# Altium PCB PCB4.PcbDoc
Units mil, origin at the board's own origin, x right, y up, seen from the top; angles counter-clockwise.
Board outline 6000 x 4000 mil, 2 copper layers (Top Layer, Bottom Layer); 80 components, 13 nets, 268 pads, 16 vias.
Unrouted connection lines stored in the file: 2.
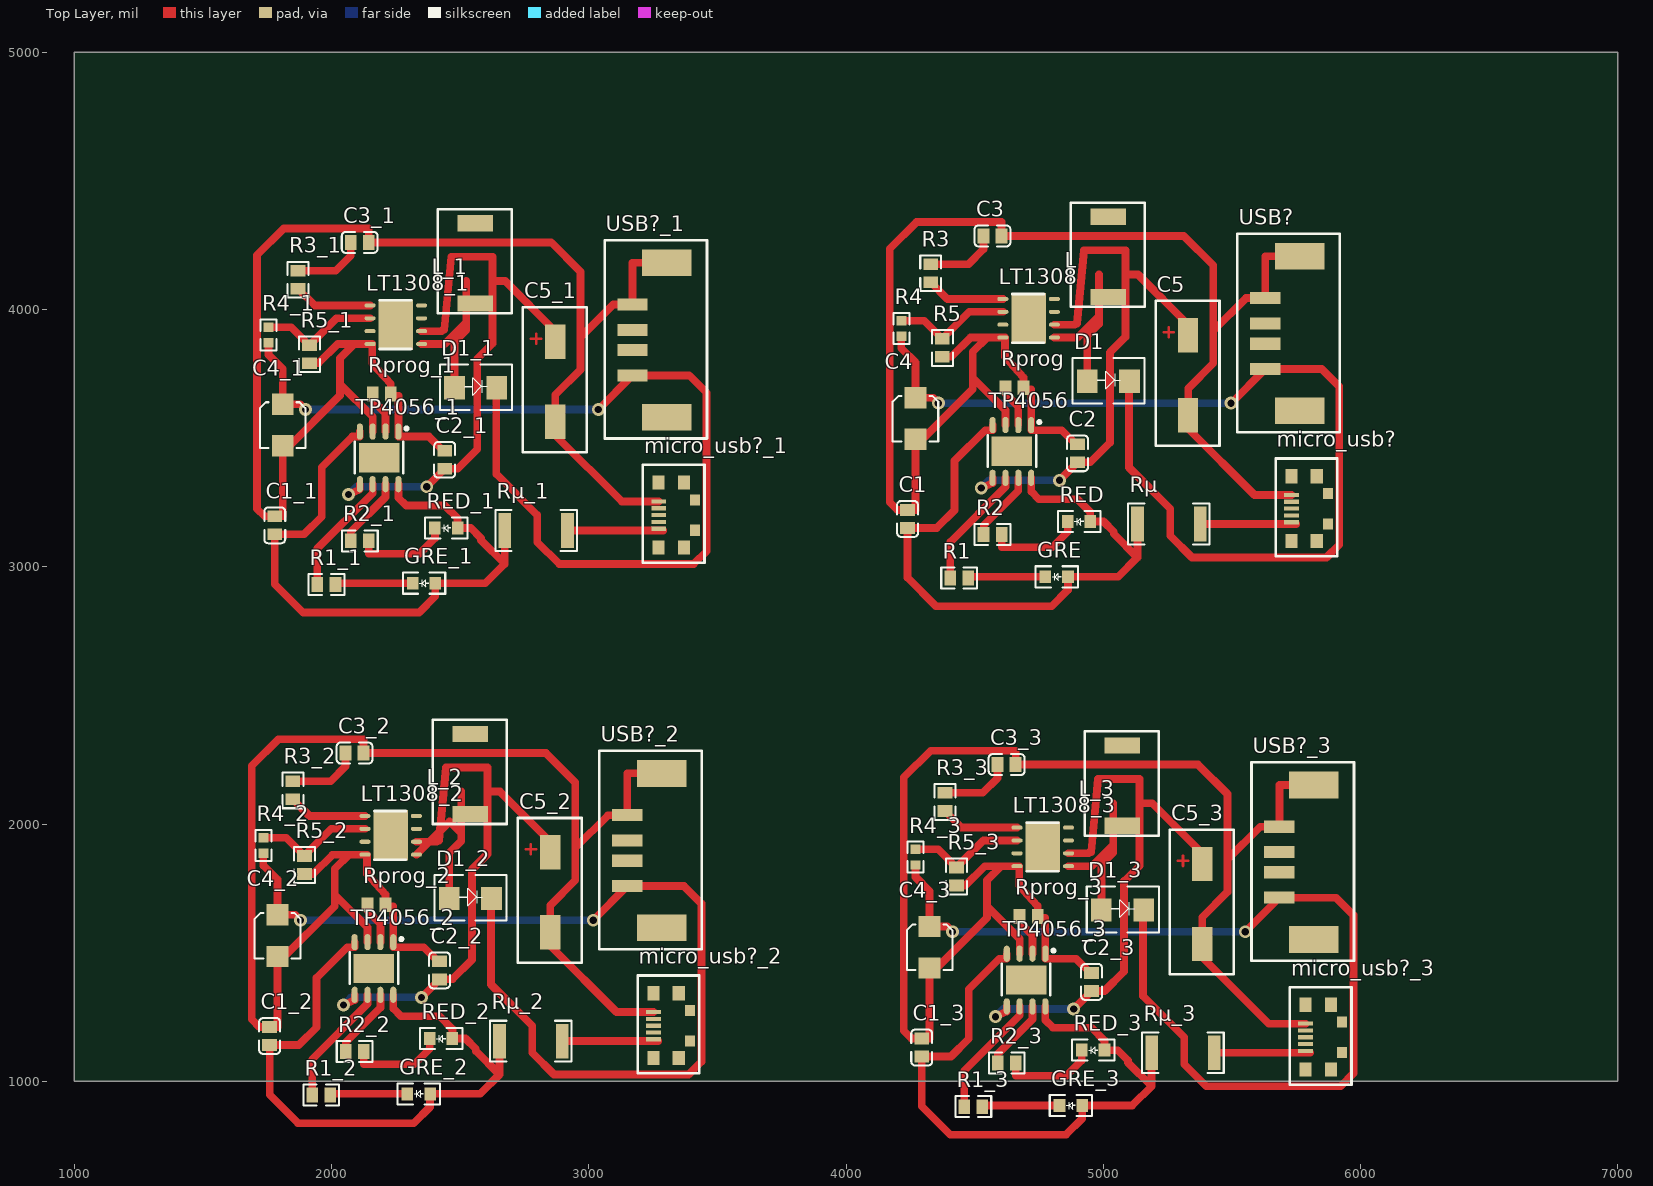
[diagram p0: Top Layer view]
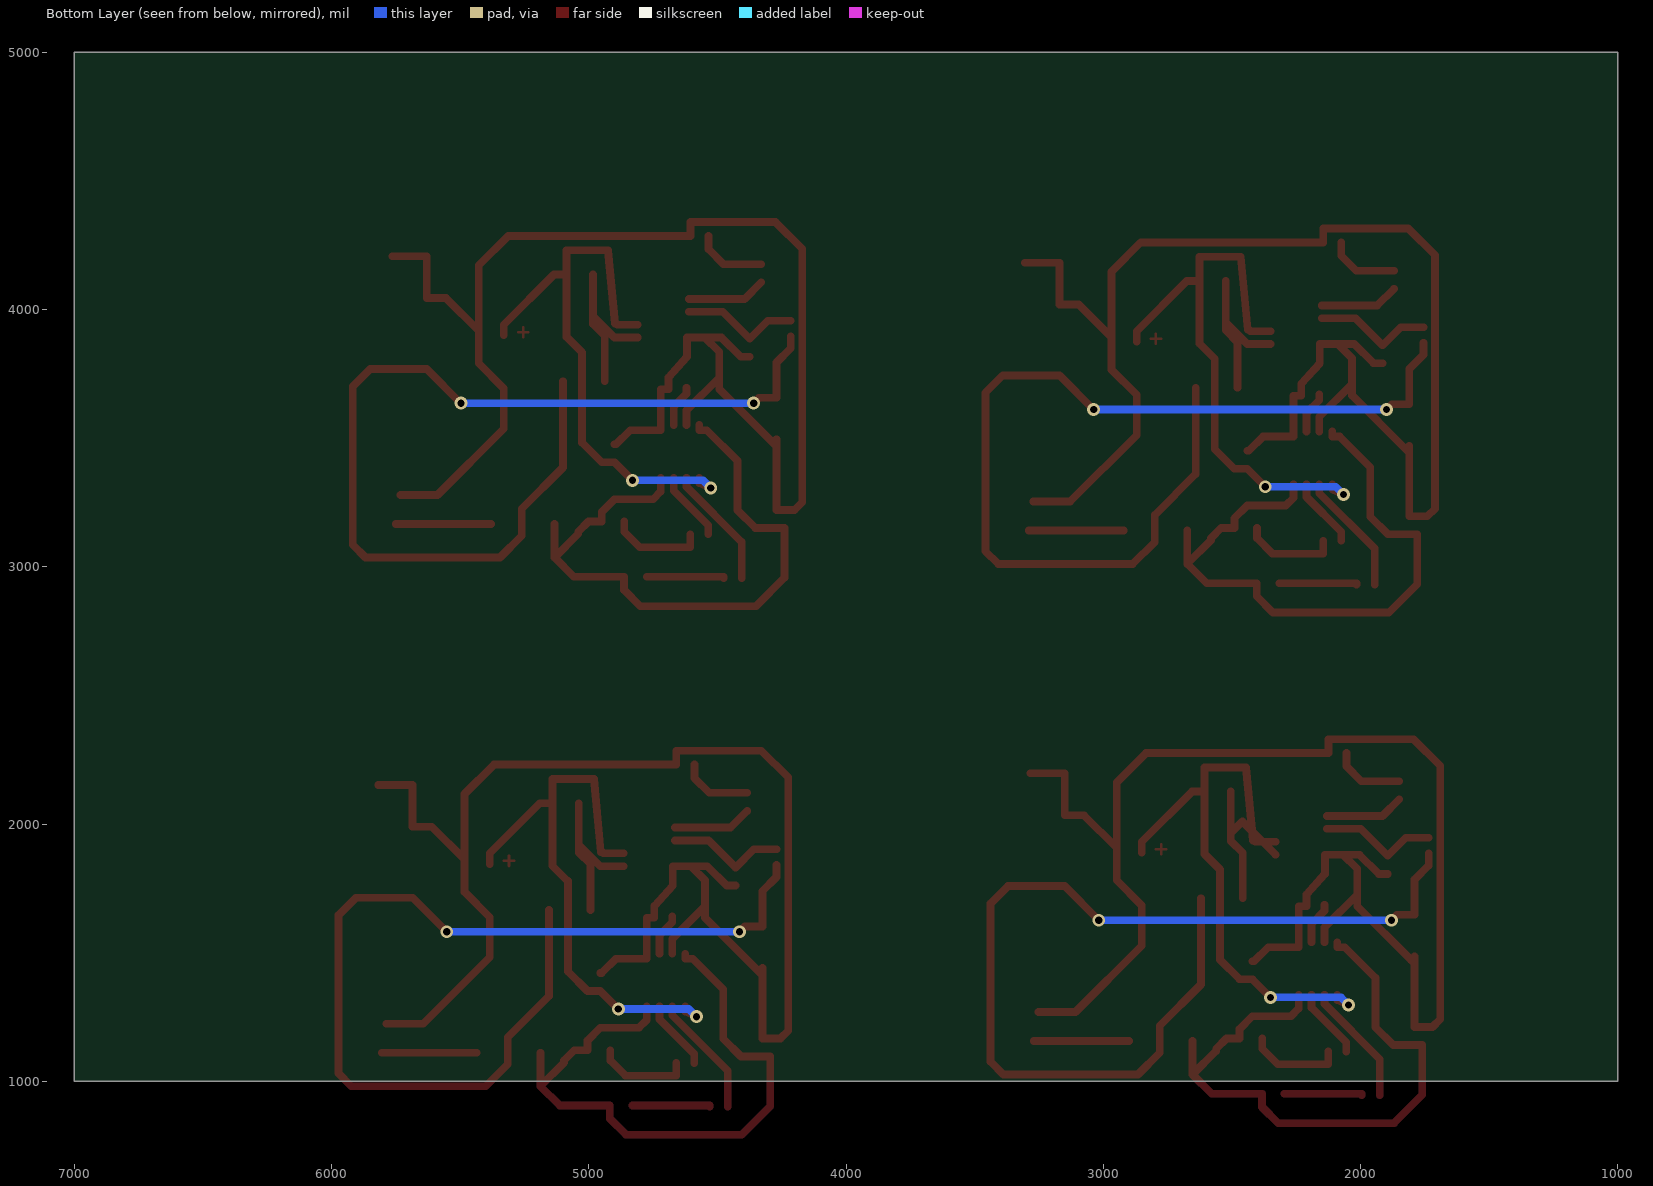
[diagram p1: Bottom Layer view, seen from below]

## Layer stack, top to bottom
Top Solder: solder mask 0.4, Solder Resist, Dk 3.5
Top Layer: signal copper 1.4
Dielectric 1: dielectric 12.6, FR-4, Dk 4.8
Bottom Layer: signal copper 1.4
Bottom Solder: solder mask 0.4, Solder Resist, Dk 3.5

## Board outline
1000,1000 7000,1000 7000,5000 1000,5000

## Design rules (kind name [scope] priority, off if disabled: settings)
Clearance [All] p1: gap=10 ignorepadtopadclearanceinfootprint=FALSE except(0: Arc-Hole Track-Hole SMDPad-Hole THPad-Hole Via-Hole Fill-Hole Poly-Hole Region-Hole Text-Hole)
PolygonConnect [All] p1: connectstyle=Relief reliefconductorwidth=10 reliefentries=4 polygonreliefangle="90 Angle" airgapwidth=10
RoutingVias [All] p1: holewidth=28 width=50 viastyle="Through Hole" minholewidth=28 minwidth=50 maxholewidth=28 maxwidth=50
SolderMaskExpansion [All] p1: expansion=4
Width [All] p1: maxlimit=30 minlimit=20 preferedwidth=30 bottomlayer_minwidth=30 minimp=50.000000 maximp=50.000000 favimp=50.000000
30 further rules are at their usual default settings.

## Classes and differential pairs
component class Sheet1: C1 C2 C3 C4 C5 D1 GRE L LT1308 micro_usb? R1 R2 R3 R4 R5 RED Rprog Rμ TP4056 USB?

## Components (designator, comment, footprint, x,y, rotation, side; value= is the part's Value field where it differs from the comment)
C1 "10μF" LC-0805_C 4239.37,3186 r270 top
C1_1 "10μF" LC-0805_C 1779.37,3161 r270 top (schematic designator C1)
C1_2 "10μF" LC-0805_C 1759.37,1176 r270 top (schematic designator C1)
C1_3 "10μF" LC-0805_C 4294.37,1131 r270 top (schematic designator C1)
C2 "10μF" LC-0805_C 4900,3441 r90 top
C2_1 "10μF" LC-0805_C 2440,3416 r90 top (schematic designator C2)
C2_2 "10μF" LC-0805_C 2420,1431 r90 top (schematic designator C2)
C2_3 "10μF" LC-0805_C 4955,1386 r90 top (schematic designator C2)
C3 "100pF" LC-0805_C 4569.37,4286 r180 top
C3_1 "100pF" LC-0805_C 2109.37,4261 r180 top (schematic designator C3)
C3_2 "100pF" LC-0805_C 2089.37,2276 r180 top (schematic designator C3)
C3_3 "100pF" LC-0805_C 4624.37,2231 r180 top (schematic designator C3)
C4 "220μF" 220微法 4270,3576 r270 top
C4_1 "220μF" 220微法 1810,3551 r270 top (schematic designator C4)
C4_2 "220μF" 220微法 1790,1566 r270 top (schematic designator C4)
C4_3 "220μF" 220微法 4325,1521 r270 top (schematic designator C4)
C5 "47μF" 47微法 5330,3746 r90 top
C5_1 "47μF" 47微法 2870,3721 r90 top (schematic designator C5)
C5_2 "47μF" 47微法 2850,1736 r90 top (schematic designator C5)
C5_3 "47μF" 47微法 5385,1691 r90 top (schematic designator C5)
D1 "D1" 肖特基二极管 5020,3721 r0 top
D1_1 "D1" 肖特基二极管 2560,3696 r0 top (schematic designator D1)
D1_2 "D1" 肖特基二极管 2540,1711 r0 top (schematic designator D1)
D1_3 "D1" 肖特基二极管 5075,1666 r0 top (schematic designator D1)
GRE "绿" 0805D 4863,2961 r180 top (schematic designator LED绿)
GRE_1 "绿" 0805D 2403,2936 r180 top (schematic designator LED绿)
GRE_2 "绿" 0805D 2383,951 r180 top (schematic designator LED绿)
GRE_3 "绿" 0805D 4918,906 r180 top (schematic designator LED绿)
L "4.7μH" 4.7微亨 5035,4136 r0 top
L_1 "4.7μH" 4.7微亨 2575,4111 r0 top (schematic designator L)
L_2 "4.7μH" 4.7微亨 2555,2126 r0 top (schematic designator L)
L_3 "4.7μH" 4.7微亨 5090,2081 r0 top (schematic designator L)
LT1308 "LT1308" LT1308 4710,3966 r270 top
LT1308_1 "LT1308" LT1308 2250,3941 r270 top (schematic designator LT1308)
LT1308_2 "LT1308" LT1308 2230,1956 r270 top (schematic designator LT1308)
LT1308_3 "LT1308" LT1308 4765,1911 r270 top (schematic designator LT1308)
micro_usb? "micro_usb" micro_USB 5830,3226 r90 top
micro_usb?_1 "micro_usb" micro_USB 3370,3201 r90 top (schematic designator micro_usb?)
micro_usb?_2 "micro_usb" micro_USB 3350,1216 r90 top (schematic designator micro_usb?)
micro_usb?_3 "micro_usb" micro_USB 5885,1171 r90 top (schematic designator micro_usb?)
R1 "1k" LC-0805_R 4440,2956 r0 top
R1_1 "1k" LC-0805_R 1980,2931 r0 top (schematic designator R1)
R1_2 "1k" LC-0805_R 1960,946 r0 top (schematic designator R1)
R1_3 "1k" LC-0805_R 4495,901 r0 top (schematic designator R1)
R2 "1k" LC-0805_R 4570,3126 r0 top
R2_1 "1k" LC-0805_R 2110,3101 r0 top (schematic designator R2)
R2_2 "1k" LC-0805_R 2090,1116 r0 top (schematic designator R2)
R2_3 "1k" LC-0805_R 4625,1071 r0 top (schematic designator R2)
R3 "47K" LC-0805_R 4329.37,4140.96 r90 top
R3_1 "47K" LC-0805_R 1869.37,4115.96 r90 top (schematic designator R3)
R3_2 "47K" LC-0805_R 1849.37,2130.96 r90 top (schematic designator R3)
R3_3 "47K" LC-0805_R 4384.37,2085.96 r90 top (schematic designator R3)
R4 "309k" LC-0603_R 4215,3926 r270 top
R4_1 "309k" LC-0603_R 1755,3901 r270 top (schematic designator R4)
R4_2 "309k" LC-0603_R 1735,1916 r270 top (schematic designator R4)
R4_3 "309k" LC-0603_R 4270,1871 r270 top (schematic designator R4)
R5 "100k" LC-0805_R 4374.33,3851.04 r90 top
R5_1 "100k" LC-0805_R 1914.33,3826.04 r90 top (schematic designator R5)
R5_2 "100k" LC-0805_R 1894.33,1841.04 r90 top (schematic designator R5)
R5_3 "100k" LC-0805_R 4429.33,1796.04 r90 top (schematic designator R5)
RED "红" 0805D 4950,3176 r180 top (schematic designator LED)
RED_1 "红" 0805D 2490,3151 r180 top (schematic designator LED)
RED_2 "红" 0805D 2470,1166 r180 top (schematic designator LED)
RED_3 "红" 0805D 5005,1121 r180 top (schematic designator LED)
Rprog "1.2k" LC-0805 4655,3696 r0 top
Rprog_1 "1.2k" LC-0805 2195,3671 r0 top (schematic designator Rprog)
Rprog_2 "1.2k" LC-0805 2175,1686 r0 top (schematic designator Rprog)
Rprog_3 "1.2k" LC-0805 4710,1641 r0 top (schematic designator Rprog)
Rμ "0.43" LC-2512_R 5255,3166 r180 top
Rμ_1 "0.43" LC-2512_R 2795,3141 r180 top (schematic designator Rμ)
Rμ_2 "0.43" LC-2512_R 2775,1156 r180 top (schematic designator Rμ)
Rμ_3 "0.43" LC-2512_R 5310,1111 r180 top (schematic designator Rμ)
TP4056 "TP4056" LC-SOP-8_EP_150mil 4645,3448.36 r180 top (schematic designator *)
TP4056_1 "TP4056" LC-SOP-8_EP_150mil 2185,3423.36 r180 top (schematic designator *)
TP4056_2 "TP4056" LC-SOP-8_EP_150mil 2165,1438.36 r180 top (schematic designator *)
TP4056_3 "TP4056" LC-SOP-8_EP_150mil 4700,1393.36 r180 top (schematic designator *)
USB? "USB" 贴片_USB 5570.94,3906.63 r270 top
USB?_1 "USB" 贴片_USB 3110.94,3881.63 r270 top (schematic designator USB?)
USB?_2 "USB" 贴片_USB 3090.94,1896.63 r270 top (schematic designator USB?)
USB?_3 "USB" 贴片_USB 5625.94,1851.63 r270 top (schematic designator USB?)

## Footprints (in the part's own frame and the unit in brackets; to place one, negate y for a bottom-side part, rotate by r counter-clockwise, add the part's x,y. Pads: shape width x height; smd on the part's side, far side on the other; paste and mask are expansions set on the pad)
4.7微亨 [mm]
  rect 3.5x1.6 smd: 1(-0.4,-2.225) 2(-0.4,5.7)
  silkscreen extent -4.1,-3.2 3.2,7.1
47微法 [mm]
  rect 3.4x2 smd: 1(3.9,0) 2(-4,0)
  Top Layer lines w0.254: 4.2,2.4 4.2,1.4 ; 3.7,1.9 4.7,1.9
  silkscreen extent -7,-3.1 7.3,3.2
220微法 [mm] "Aluminum Electrolytic Capacitor, Body 4.30x4.30x6.30mm, IPC Low Density"
  rect 2.1x2.15 smd: 1(-2.05,0) 2(2.05,0)
  silkscreen extent -2.25,-2.25 2.25,2.25, body extent -2.25,-2.25 2.25,2.25, height 6.3
0805D [mil]
  rect 45x50 smd: A(0,0) K(88,0)
  silkscreen extent -39,-41 126,41
LC-0603_R [mm]
  rect 0.93x0.98 smd: 1(-0.77,0) 2(0.77,0)
  silkscreen extent -1.53,-0.79 1.54,0.79, body extent -0.85,-0.4 0.85,0.4, height 0.56
LC-0805 [mm]
  rect 1.16x1.47 smd: 1(-0.89,0) 2(0.89,0)
LC-0805_C [mm]
  rect 1.16x1.47 smd: 1(-0.89,0) 2(0.89,0)
  silkscreen extent -1.77,-1.04 1.77,1.04, body extent -1,-0.62 1,0.63, height 0.77
LC-0805_R [mm]
  rect 1.16x1.47 smd: 1(-0.89,0) 2(0.89,0)
  silkscreen extent -1.77,-1.03 1.77,1.03, body extent -1,-0.62 1,0.63, height 0.49
LC-2512_R [mm]
  rect 1.25x3.42 smd: 1(-3.1,0) 2(3.1,0)
  silkscreen extent -4.02,-2.01 4.02,2.01, body extent -3.16,-1.6 3.16,1.6, height 0.62
LC-SOP-8_EP_150mil [mm]
  rect 4x2.9 smd: 0(0,0)
  oval 0.6x1.6 smd: 1(-1.905,-2.6) 2(-0.635,-2.6) 3(0.635,-2.6) 4(1.905,-2.6) 5(1.905,2.6) 6(0.635,2.6) 7(-0.635,2.6) 8(-1.905,2.6)
  silkscreen extent -2.85,-3.05 2.4,1.5
LT1308 [mm]
  rect 5x3.4 smd: 0(0,0)
  oval 0.4x1.1 smd: 1(-1.905,-2.54) 2(-0.635,-2.54) 3(0.635,-2.54) 4(1.905,-2.54) 5(1.905,2.54) 6(0.635,2.54) 7(-0.635,2.54) 8(-1.905,2.54)
  silkscreen extent -2.4,-1.6 2.4,1.5
micro_USB [mil]
  rect 16.32x57.14 smd: 1(-53,98.42) 2(-26.5,98.42) 3(0,98.42) 4(26.5,98.42) 5(53,98.42)
  rect 55.12x47.24 smd: 6(-126,98.42) 7(-126,0) 8(126,98.42) 9(126,0)
  rect 43.3x39.37 smd: 10(-59.06,-43.31) 11(59.06,-43.31)
  silkscreen extent -185,-80 195,160
肖特基二极管 [mil]
  rect 80x90 smd: 1(-82,0) 2(82,0)
  silkscreen extent -139,-87 141,91
贴片_USB [mm]
  rect 1.2x3 smd: 1(-3.5,1.5) 2(-1,1.5) 3(1,1.5) 4(3.5,1.5)
  rect 2.65x4.9 smd: 5(-7.625,4.9) 6(7.625,4.9)
  silkscreen extent -9.86,-1.26 9.73,8.86

## Part data
C1 C1_1 C1_2 C1_3 C2 C2_1 C2_2 C2_3 C3 C3_1 C3_2 C3_3: library part 电容
C4 C4_1 C4_2 C4_3 C5 C5_1 C5_2 C5_3: library part CD, "电解电容"
GRE GRE_1 GRE_2 GRE_3 RED RED_1 RED_2 RED_3: library part LED, "LED发光管"
L L_1 L_2 L_3: library part 空心电感
R1 R1_1 R1_2 R1_3 R2 R2_1 R2_2 R2_3 R3 R3_1 R3_2 R3_3 R4 R4_1 R4_2 R4_3 R5 R5_1 R5_2 R5_3 Rprog Rprog_1 Rprog_2 Rprog_3 Rμ Rμ_1 Rμ_2 Rμ_3: library part R, "电阻"

## Via types
v1: diameter 50, hole 28, Top Layer to Bottom Layer, 16 vias

## Nets (pads, with @x,y where several pads share a name; then routed paths per layer and width w, separated by ;. In a path a pad name is that pad's centre, name@x,y a point inside that pad or via, vN(x,y) a via of type N, cw(c..) or ccw(c..) an arc to the next point about the centre after c; other vN are vias at no path point)
GND: C1.1 C2.2 C3.1 C4.2 C5.2 LT1308.4 micro_usb?.4 micro_usb?.5 R5.1 Rprog.2 TP4056.1 TP4056.3 USB?.1 USB?.5 | length 6178.7
  Top Layer w30: C4.2 C4.2@4270,3468 ; R5.1 4409,3816 4484,3891 4548,3891 ; TP4056.3 4620,3608 4493,3735 ; C2.2 4894,3476.04 4839.04,3531 4720,3531 TP4056.1 4720,3690 4690.04,3690 Rprog.2 4690.04,3736 4618,3816 4618,3891 LT1308.4 4548,3891 ; micro_usb?.5 5588,3279 5330,3537 C5.2 5330,3693 5428,3791 5428,3917.43 ; USB?.5 5630,4206.83 USB?.1 5555,4044.43 5428,3917.43 ; C4.2@4270,3468 4283.65,3481.64 4493,3691 4493,3735 ; C4.2@4270,3468 4270,3221.04 C1.1 4200,3221.04 4170,3251.04 4170,4236 4274,4340 4604.41,4340 C3.1 5313.43,4286 5428,4171.43 5428,3917.43 ; 4493,3735 4493,3836 4548,3891
Net*_2: Rprog.1 TP4056.2 | length 166
  Top Layer w30: Rprog.1 4619.96,3673 4670,3622.96 TP4056.2
Net*_4: C1.2 GRE.A RED.A Rμ.2 TP4056.4 TP4056.8 | length 2590
  Top Layer w30: TP4056.4 4570,3531 4541,3531 4421.93,3411.93 4421.93,3219.89 4353,3150.96 C1.2 4239.37,2957.63 4350,2847 4800,2847 4863,2910 GRE.A 5057.95,2961 5132.95,3036 ; TP4056.8 4720,3293 4750,3263 4900,3263 4950,3213 RED.A 5001,3176 5041,3136 5041,3127.95 5132.95,3036 ; Rμ.2 5132.95,3036
Net*_5: C2.1 C5.1 L.1 LT1308.6 TP4056.5 | length 2316.8
  Top Layer w30: v1(4526,3306) 4570,3326 TP4056.5 ; LT1308.6 4888,3941 4893,3946 4898,3946 4925,4230 5086.18,4230 5086.18,4136 ; v1(4830.04,3336) C2.1 4950,3405.96 5026,3481.96 5026,3833 5086.18,3893.18 5086.18,4136 ; C5.1 5330,3941 5135,4136 5086.18,4136
  Bottom Layer w30: v1(4526,3306) 4556,3336 v1(4830.04,3336)
Net*_6: R1.1 TP4056.6 | length 479.1
  Top Layer w30: R1.1 4404.96,3095.96 4620,3311 TP4056.6
Net*_7: R2.1 TP4056.7 | length 275.9
  Top Layer w30: R2.1 4534.96,3161 4670,3296.04 TP4056.7
NetC3_2: C3.2 R3.2 | length 281
  Top Layer w30: R3.2 4476.33,4176 4534.33,4234 C3.2
NetC4_1: C4.1 D1.2 R4.2 USB?.4 | length 4008.6
  Top Layer w30: R4.2 4215,3849 4270,3794 C4.1 4338.29,3656.71 v1(4359,3636) ; D1.2@5100,3721 5100,3386 5260,3226 5260,3121 5345,3036 5585,3036 5685,3036 ; v1(5497.17,3636) USB?.4 5850,3768.83 5918,3700.83 5918,3086 5868,3036 5673,3036
  Bottom Layer w30: v1(4359,3636) v1(5497.17,3636)
NetD1_1: D1.1 L.2 LT1308.5 | length 642.5
  Top Layer w30: LT1308.5 4900,3891 4983.82,3974.82 ; D1.1 4938,3898.18 4983.82,3944 4983.82,3974.82 ; 4983.82,4136 4983.82,3974.82
NetLED_K: R2.2 RED.K | length 371.9
  Top Layer w30: R2.2 4605.04,3075.96 4801.96,3075.96 4862,3136 RED.K
NetLED绿_K: GRE.K R1.2 | length 305
  Top Layer w30: R1.2 4475.04,2961 GRE.K
NetLT1308_1: LT1308.1 R3.1 | length 307.5
  Top Layer w30: R3.1 4394.29,4041 LT1308.1
NetLT1308_2: LT1308.2 R4.1 R5.2 | length 467.6
  Top Layer w30: R4.1 4303.77,3956.31 4374,3886.08 R5.2 4479.25,3991 LT1308.2
pads on no net: C1_1.1 C1_1.2 C1_2.1 C1_2.2 C1_3.1 C1_3.2 C2_1.1 C2_1.2 C2_2.1 C2_2.2 C2_3.1 C2_3.2 C3_1.1 C3_1.2 C3_2.1 C3_2.2 C3_3.1 C3_3.2 C4_1.1 C4_1.2 C4_2.1 C4_2.2 C4_3.1 C4_3.2 C5_1.1 C5_1.2 C5_2.1 C5_2.2 C5_3.1 C5_3.2 D1_1.1 D1_1.2 D1_2.1 D1_2.2 D1_3.1 D1_3.2 GRE_1.A GRE_1.K GRE_2.A GRE_2.K GRE_3.A GRE_3.K L_1.1 L_1.2 L_2.1 L_2.2 L_3.1 L_3.2 LT1308.0 LT1308.3 LT1308.7 LT1308.8 LT1308_1.0 LT1308_1.1 LT1308_1.2 LT1308_1.3 LT1308_1.4 LT1308_1.5 LT1308_1.6 LT1308_1.7 LT1308_1.8 LT1308_2.0 LT1308_2.1 LT1308_2.2 LT1308_2.3 LT1308_2.4 LT1308_2.5 LT1308_2.6 LT1308_2.7 LT1308_2.8 LT1308_3.0 LT1308_3.1 LT1308_3.2 LT1308_3.3 LT1308_3.4 LT1308_3.5 LT1308_3.6 LT1308_3.7 LT1308_3.8 micro_usb?.1 micro_usb?.2 micro_usb?.3 micro_usb?.6 micro_usb?.7 micro_usb?.8 micro_usb?.9 micro_usb?.10 micro_usb?.11 micro_usb?_1.1 micro_usb?_1.2 micro_usb?_1.3 micro_usb?_1.4 micro_usb?_1.5 micro_usb?_1.6 micro_usb?_1.7 micro_usb?_1.8 micro_usb?_1.9 micro_usb?_1.10 micro_usb?_1.11 micro_usb?_2.1 micro_usb?_2.2 micro_usb?_2.3 micro_usb?_2.4 micro_usb?_2.5 micro_usb?_2.6 micro_usb?_2.7 micro_usb?_2.8 micro_usb?_2.9 micro_usb?_2.10 micro_usb?_2.11 micro_usb?_3.1 micro_usb?_3.2 micro_usb?_3.3 micro_usb?_3.4 micro_usb?_3.5 micro_usb?_3.6 micro_usb?_3.7 micro_usb?_3.8 micro_usb?_3.9 micro_usb?_3.10 micro_usb?_3.11 R1_1.1 R1_1.2 R1_2.1 R1_2.2 R1_3.1 R1_3.2 R2_1.1 R2_1.2 R2_2.1 R2_2.2 R2_3.1 R2_3.2 R3_1.1 R3_1.2 R3_2.1 R3_2.2 R3_3.1 R3_3.2 R4_1.1 R4_1.2 R4_2.1 R4_2.2 R4_3.1 R4_3.2 R5_1.1 R5_1.2 R5_2.1 R5_2.2 R5_3.1 R5_3.2 RED_1.A RED_1.K RED_2.A RED_2.K RED_3.A RED_3.K Rprog_1.1 Rprog_1.2 Rprog_2.1 Rprog_2.2 Rprog_3.1 Rprog_3.2 Rμ.1 Rμ_1.1 Rμ_1.2 Rμ_2.1 Rμ_2.2 Rμ_3.1 Rμ_3.2 TP4056.0 TP4056_1.0 TP4056_1.1 TP4056_1.2 TP4056_1.3 TP4056_1.4 TP4056_1.5 TP4056_1.6 TP4056_1.7 TP4056_1.8 TP4056_2.0 TP4056_2.1 TP4056_2.2 TP4056_2.3 TP4056_2.4 TP4056_2.5 TP4056_2.6 TP4056_2.7 TP4056_2.8 TP4056_3.0 TP4056_3.1 TP4056_3.2 TP4056_3.3 TP4056_3.4 TP4056_3.5 TP4056_3.6 TP4056_3.7 TP4056_3.8 USB?.2 USB?.3 USB?.6 USB?_1.1 USB?_1.2 USB?_1.3 USB?_1.4 USB?_1.5 USB?_1.6 USB?_2.1 USB?_2.2 USB?_2.3 USB?_2.4 USB?_2.5 USB?_2.6 USB?_3.1 USB?_3.2 USB?_3.3 USB?_3.4 USB?_3.5 USB?_3.6
copper on no net: | length 56688.3
  Top Layer w30: 1735,1885.68 1735,1839 1790,1784 1790,1646.71 1858.29,1646.71 v1(1879,1626) ; 1735,1946.31 1823.77,1946.31 1894,1876.08 1894.33,1876.08 1999.25,1981 2130,1981 ; 1755,3870.68 1755,3824 1810,3769 1810,3631.71 1878.29,3631.71 v1(1899,3611) ; 1755,3931.31 1843.77,3931.31 1914,3861.08 1914.33,3861.08 2019.25,3966 2150,3966 ; 1790,1485.29 1790,1458 ; 1810,3470.29 1810,3443 ; 1849.37,2095.92 1914.29,2031 2130,2031 ; 1849.37,2166 1996.33,2166 2054.33,2224 2054.33,2276 ; 1869.37,4080.92 1934.29,4016 2150,4016 ; 1869.37,4151 2016.33,4151 2074.33,4209 2074.33,4261 ; 1894.33,1806 1929,1806 2004,1881 2068,1881 ; 1914.33,3791 1949,3791 2024,3866 2088,3866 ; 1924.96,946 1924.96,1085.96 2140,1301 2140,1336 ; 1944.96,2931 1944.96,3070.96 2160,3286 2160,3321 ; 1995.04,946 1995.04,951 2295,951 ; 2015.04,2931 2015.04,2936 2315,2936 ; v1(2046,1296) 2090,1316 2090,1336 ; 2054.96,1116 2054.96,1151 2190,1286.04 2190,1336 ; v1(2066,3281) 2110,3301 2110,3321 ; 2074.96,3101 2074.96,3136 2210,3271.04 2210,3321 ; 2090,1540.72 2090,1521 2061,1521 1941.93,1401.93 1941.93,1209.89 1873,1140.96 1759.37,1140.96 1759.37,947.63 1870,837 2320,837 2383,900 2383,951 2577.95,951 2652.95,1026 ; 2110,3525.72 2110,3506 2081,3506 1961.93,3386.93 1961.93,3194.89 1893,3125.96 1779.37,3125.96 1779.37,2932.63 1890,2822 2340,2822 2403,2885 2403,2936 2597.95,2936 2672.95,3011 ; 2125.04,1116 2125.04,1065.96 2321.96,1065.96 2382,1126 2382,1166 ; 2139.96,1686 2139.96,1663 2190,1612.96 2190,1540.72 ; 2140,1540.72 2140,1598 2013,1725 ; 2145.04,3101 2145.04,3050.96 2341.96,3050.96 2402,3111 2402,3151 ; 2159.96,3671 2159.96,3648 2210,3597.96 2210,3525.72 ; 2160,3525.72 2160,3583 2033,3710 ; 2240,1336 2240,1283 2270,1253 2420,1253 2470,1203 2470,1166 2521,1166 2561,1126 2561,1117.95 2652.95,1026 ; 2260,3321 2260,3268 2290,3238 2440,3238 2490,3188 2490,3151 2541,3151 2581,3111 2581,3102.95 2672.95,3011 ; 2330,1881 2458.82,2009.82 2503.82,1964.82 ; 2330,1931 2408,1931 2413,1936 2418,1936 2445,2220 2606.18,2220 2606.18,2126 ; 2350,3866 2440,3866 2523.82,3949.82 ; 2350,3916 2428,3916 2433,3921 2438,3921 2465,4205 2626.18,4205 2626.18,4111 ; v1(2350.04,1326) 2420,1395.96 2470,1395.96 2546,1471.96 2546,1823 2606.18,1883.18 2606.18,2126 ; v1(2370.04,3311) 2440,3380.96 2490,3380.96 2566,3456.96 2566,3808 2626.18,3868.18 2626.18,4111 ; 2420,1466.04 2414,1466.04 2359.04,1521 2240,1521 2240,1540.72 2240,1680 2210.04,1680 2210.04,1686 2210.04,1726 2138,1806 2138,1881 2130,1881 2068,1881 ; 2440,3451.04 2434,3451.04 2379.04,3506 2260,3506 2260,3525.72 2260,3665 2230.04,3665 2230.04,3671 2230.04,3711 2158,3791 2158,3866 2150,3866 2088,3866 ; 2458,1711 2458,1888.18 2503.82,1934 2503.82,1964.82 ; 2478,3696 2478,3873.18 2523.82,3919 2523.82,3949.82 ; 2503.82,2126 2503.82,1964.82 ; 2523.82,4111 2523.82,3949.82 ; 2620,1711 2620,1376 2780,1216 2780,1111 2865,1026 3105,1026 3205,1026 ; 2640,3696 2640,3361 2800,3201 2800,3096 2885,3011 3125,3011 3225,3011 ; 2652.95,1156 2652.95,1026 ; 2672.95,3141 2672.95,3011 ; 2850,1889.54 2850,1931 2655,2126 2606.18,2126 ; 2870,3874.54 2870,3916 2675,4111 2626.18,4111 ; 2900,1156 3270,1156 ; 2920,3141 3290,3141 ; v1(3017.17,1626) 3150,1758.83 3370,1758.83 3438,1690.83 3438,1076 3388,1026 3193,1026 ; v1(3037.17,3611) 3170,3743.83 3390,3743.83 3458,3675.83 3458,3061 3408,3011 3213,3011 ; 3251.58,1269 3108,1269 2850,1527 2850,1578.52 2850,1683 2948,1781 2948,1907.43 ; 3271.58,3254 3128,3254 2870,3512 2870,3563.52 2870,3668 2968,3766 2968,3892.43 ; 3283.86,2196.83 3150,2196.83 3150,2034.43 3075,2034.43 2948,1907.43 ; 3303.86,4181.83 3170,4181.83 3170,4019.43 3095,4019.43 2968,3892.43 ; 4270,1840.68 4270,1794 4325,1739 4325,1601.71 4393.29,1601.71 v1(4414,1581) ; 4270,1901.31 4358.77,1901.31 4429,1831.08 4429.33,1831.08 4534.25,1936 4665,1936 ; 4325,1440.29 4325,1413 ; 4384.37,2050.92 4449.29,1986 4665,1986 ; 4384.37,2121 4531.33,2121 4589.33,2179 4589.33,2231 ; 4429.33,1761 4464,1761 4539,1836 4603,1836 ; 4459.96,901 4459.96,1040.96 4675,1256 4675,1291 ; 4530.04,901 4530.04,906 4830,906 ; v1(4581,1251) 4625,1271 4625,1291 ; 4589.96,1071 4589.96,1106 4725,1241.04 4725,1291 ; 4625,1495.72 4625,1476 4596,1476 4476.93,1356.93 4476.93,1164.89 4408,1095.96 4294.37,1095.96 4294.37,902.63 4405,792 4855,792 4918,855 4918,906 5112.95,906 5187.95,981 ; 4660.04,1071 4660.04,1020.96 4856.96,1020.96 4917,1081 4917,1121 ; 4674.96,1641 4674.96,1618 4725,1567.96 4725,1495.72 ; 4675,1495.72 4675,1553 4548,1680 ; 4775,1291 4775,1238 4805,1208 4955,1208 5005,1158 5005,1121 5056,1121 5096,1081 5096,1072.95 5187.95,981 ; 4865,1836 4955,1836 5038.82,1919.82 ; 4865,1886 4943,1886 4948,1891 4953,1891 4980,2175 5141.18,2175 5141.18,2081 ; v1(4885.04,1281) 4955,1350.96 5005,1350.96 5081,1426.96 5081,1778 5141.18,1838.18 5141.18,2081 ; 4955,1421.04 4949,1421.04 4894.04,1476 4775,1476 4775,1495.72 4775,1635 4745.04,1635 4745.04,1641 4745.04,1681 4673,1761 4673,1836 4665,1836 4603,1836 ; 4993,1666 4993,1843.18 5038.82,1889 5038.82,1919.82 ; 5038.82,2081 5038.82,1919.82 ; 5155,1666 5155,1331 5315,1171 5315,1066 5400,981 5640,981 5740,981 ; 5187.95,1111 5187.95,981 ; 5380,3166 5750,3166 ; 5385,1844.54 5385,1886 5190,2081 5141.18,2081 ; 5435,1111 5805,1111 ; v1(5552.17,1581) 5685,1713.83 5905,1713.83 5973,1645.83 5973,1031 5923,981 5728,981 ; 5786.58,1224 5643,1224 5385,1482 5385,1533.52 5385,1638 5483,1736 5483,1862.43 ; 5818.86,2151.83 5685,2151.83 5685,1989.43 5610,1989.43 5483,1862.43 ; 1790,1458 1790,1211.04 1759.37,1211.04 1720,1211.04 1690,1241.04 1690,2226 1794,2330 2124.41,2330 2124.41,2276 2833.43,2276 2948,2161.43 2948,1907.43 ; 1790,1458 1803.64,1471.64 2013,1681 2013,1725 ; 1810,3443 1810,3196.04 1779.37,3196.04 1740,3196.04 1710,3226.04 1710,4211 1814,4315 2144.41,4315 2144.41,4261 2853.43,4261 2968,4146.43 2968,3892.43 ; 1810,3443 1823.64,3456.64 2033,3666 2033,3710 ; 2013,1725 2013,1826 2068,1881 ; 2033,3710 2033,3811 2088,3866 ; 4325,1413 4325,1166.04 4294.37,1166.04 4255,1166.04 4225,1196.04 4225,2181 4329,2285 4659.41,2285 4659.41,2231 5368.43,2231 5483,2116.43 5483,1862.43 ; 4325,1413 4338.65,1426.64 4548,1636 4548,1680 ; 4548,1680 4548,1781 4603,1836
  Bottom Layer w30: v1(1879,1626) v1(3017.17,1626) ; v1(1899,3611) v1(3037.17,3611) ; v1(2046,1296) 2076,1326 v1(2350.04,1326) ; v1(2066,3281) 2096,3311 v1(2370.04,3311) ; v1(4414,1581) v1(5552.17,1581) ; v1(4581,1251) 4611,1281 v1(4885.04,1281)